# Altium PCB PCB1.PcbDoc
Units mm, origin at the board's own origin, x right, y up, seen from the top; angles counter-clockwise.
Board outline 152.4 x 101.6 mm, 2 copper layers (Top Layer, Bottom Layer); 1 components, 0 nets, 29 pads, 0 vias.
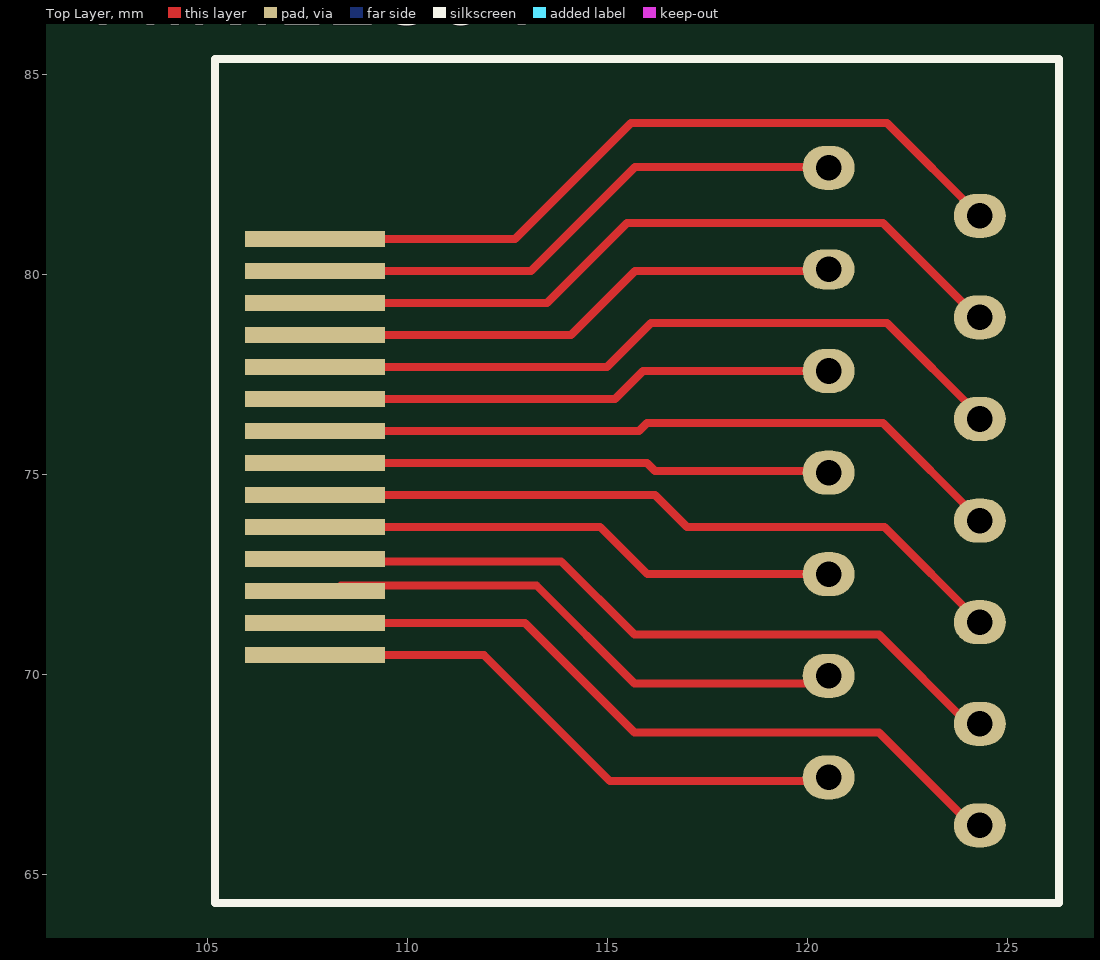
[diagram p0: Top Layer view]
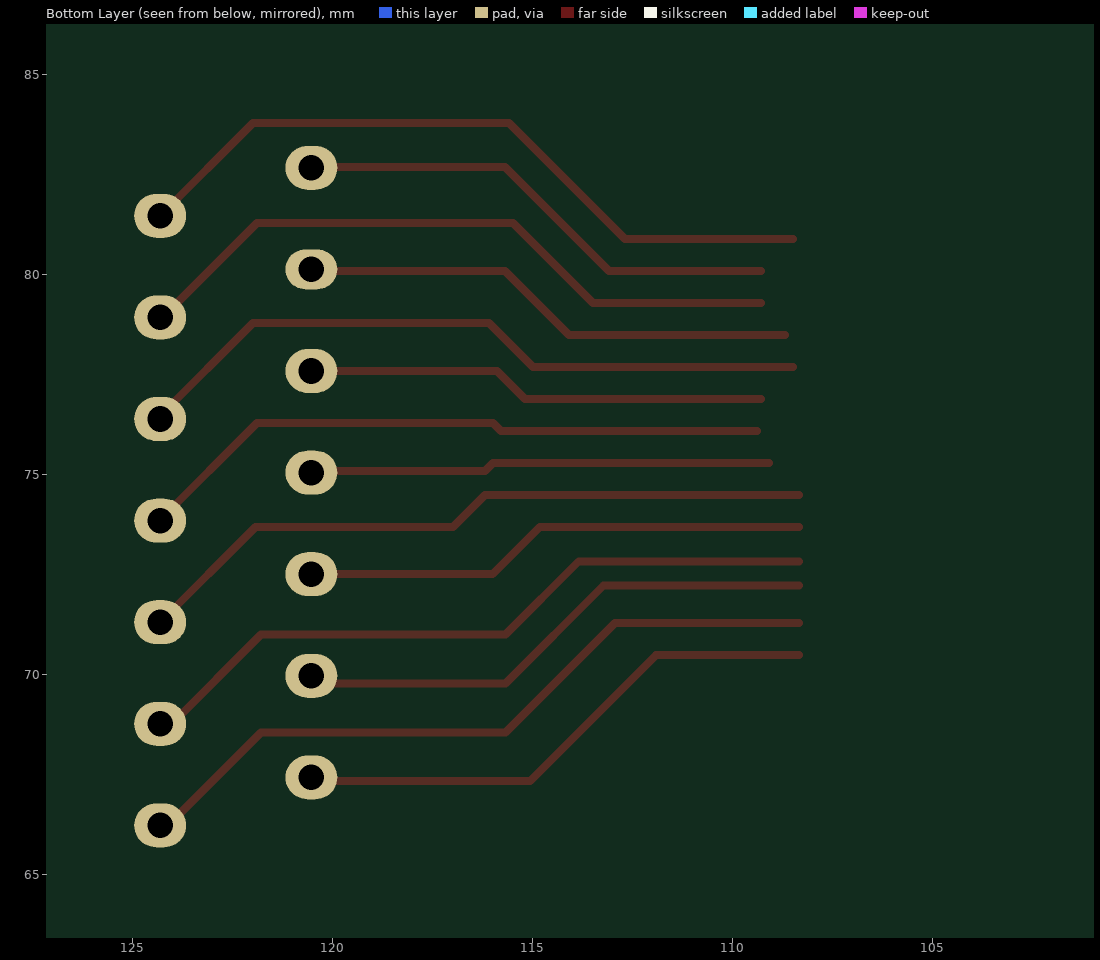
[diagram p1: Bottom Layer view, seen from below]

## Layer stack, top to bottom
Top Layer: signal copper 0.0356
Dielectric: dielectric 0.32, FR-4, Dk 4.8
Bottom Layer: signal copper 0.0356

## Board outline
25.4,25.4 177.8,25.4 177.8,127 25.4,127

## Design rules (kind name [scope] priority, off if disabled: settings)
Clearance [All] p1: gap=0.254
PolygonConnect [All] p1: connectstyle=Relief reliefconductorwidth=0.254 reliefentries=4 polygonreliefangle="90 Angle"
RoutingVias [All] p1: holewidth=0.711 width=1.27 viastyle="Through Hole" minholewidth=0.711 minwidth=1.27 maxholewidth=0.711 maxwidth=1.27
SilkscreenOverComponentPads [All] p1: minsilkscreentomaskgap=0.254
SolderMaskExpansion [All] p1: expansion=0.102
Width [All] p1: maxlimit=0.254 minlimit=0.254 preferedwidth=0.254
27 further rules are at their usual default settings.

## Components (designator, comment, footprint, x,y, rotation, side; value= is the part's Value field where it differs from the comment)
MINI12864 "MINI12864" MINI12864 105.283,64.897 r0 top

## Footprints (in the part's own frame and the unit in brackets; to place one, negate y for a bottom-side part, rotate by r counter-clockwise, add the part's x,y. Pads: shape width x height; smd on the part's side, far side on the other; paste and mask are expansions set on the pad)
MINI12864 [mm]
  rect 3.5x0.407 on Top Paste: 1(-1.7,7.4)
  rect 3.5x0.407 smd: 1(2.4,5.6) 2(2.4,6.4) 3(2.4,7.2) 4(2.4,8) 5(2.4,8.8) 6(2.4,9.6) 7(2.4,10.4) 8(2.4,11.2) 9(2.4,12.8) 10(2.4,12) 11(2.4,13.6) 12(2.4,14.4) 13(2.4,15.2) 14(2.4,16)
  oval 1.3x1.1 hole 0.64: 15(15.24,2.54) 16(19.02,1.34) 17(15.24,5.08) 18(19.02,3.88) 19(15.24,7.62) 20(19.02,6.42) 21(15.24,10.16) 22(19.02,8.96) 23(15.24,12.7) 24(19.02,11.5) 26(19.02,14.04) 27(15.24,17.78) 28(19.02,16.58)
  oval 1.3x1 hole 0.64: 25(15.24,15.24)
  Top Layer lines w0.2: 3.055,5.6 6.62,5.6 9.776,2.444 15.144,2.444 15.24,2.54 ; 3.055,6.4 7.653,6.4 10.387,3.666 16.497,3.666 18.823,1.34 ; 3.055,7.332 7.943,7.332 10.387,4.888 15.048,4.888 15.24,5.08 ; 3.055,7.943 8.554,7.943 10.387,6.11 16.497,6.11 18.727,3.88 19.02,3.88 ; 3.055,8.8 9.53,8.8 10.71,7.62 15.24,7.62 ; 3.055,9.6 10.9,9.6 11.335,9.165 11.7,8.8 16.64,8.8 19.02,6.42 ; 3.2,12.8 9.7,12.8 10.8,13.9 16.7,13.9 19.02,11.58 19.02,11.5 ; 3.2,16 7.4,16 10.3,18.9 16.7,18.9 19.02,16.58 ; 3.4,13.6 8.8,13.6 10.4,15.2 15.2,15.2 15.24,15.24 ; 3.8,10.4 10.7,10.4 10.9,10.2 15.2,10.2 15.24,10.16 ; 4,12 9.9,12 10.6,12.7 15.24,12.7 ; 4,14.4 8.2,14.4 10.2,16.4 16.6,16.4 18.96,14.04 19.02,14.04 ; 4,15.2 7.8,15.2 10.4,17.8 15.22,17.8 15.24,17.78 ; 4.1,11.2 10.5,11.2 10.7,11.4 16.6,11.4 19.02,8.98 19.02,8.96
  Bottom Layer lines w0.2: 18.6,1.4 18.96,1.4
  silkscreen extent -0.1,-0.6 21,20.5

## Part data
MINI12864: library part Component_2

## Nets (pads, with @x,y where several pads share a name; then routed paths per layer and width w, separated by ;. In a path a pad name is that pad's centre, name@x,y a point inside that pad or via, vN(x,y) a via of type N, cw(c..) or ccw(c..) an arc to the next point about the centre after c; other vN are vias at no path point)
pads on no net: MINI12864.1 MINI12864.2 MINI12864.3 MINI12864.4 MINI12864.5 MINI12864.6 MINI12864.7 MINI12864.8 MINI12864.9 MINI12864.10 MINI12864.11 MINI12864.12 MINI12864.13 MINI12864.14 MINI12864.15 MINI12864.16 MINI12864.17 MINI12864.18 MINI12864.19 MINI12864.20 MINI12864.21 MINI12864.22 MINI12864.23 MINI12864.24 MINI12864.25 MINI12864.26 MINI12864.27 MINI12864.28